# Allegro board ETDS_CHIP_AN.brd
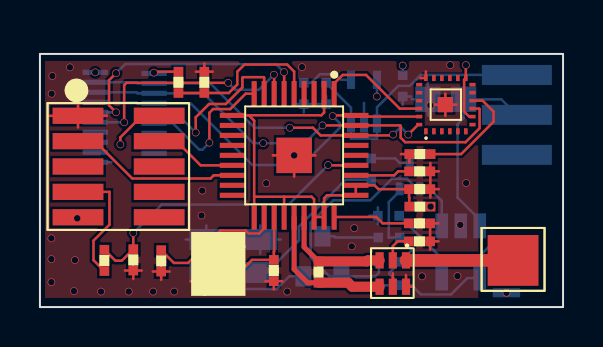
[diagram p0: board, top side]
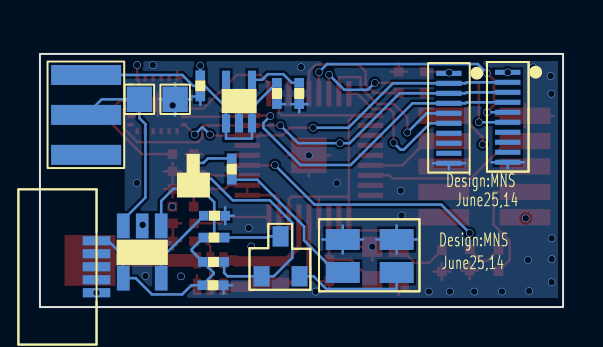
[diagram p1: board, bottom side, seen from below]

Outline 26.19 x 12.67 mm; copper layers: TOP, GND, VCC3V, BOTTOM. Coordinates in mm from the lower left corner of the outline.
Outline path: rectangle 0,0 26.19,12.67

## Placement (name value [footprint] x y rotation side)
C2  10nF  [C0402]  13.89 11.66 270 bottom
C3  1uF  [C0402]  18.85 12.04 270 bottom
C4  22pF  [C0402]  11.02 2.79 270 top
C5  22pF  [C0402]  5.38 3.28 270 top
C7  1uF  [C0402]  18.05 6.11 0 top
C8  1uF  [C0402]  18.05 5.22 0 top
C11  22pF  [C0402]  18.03 2.6 0 top
C32  1uF  [C0402]  18.49 0.41 180 bottom
C39  1uF  [C0402]  15.01 11.66 270 bottom
C40  1nF  [C0402]  3.99 3.33 270 top
C42  0.1uF  [C0402]  19.99 8.34 180 top
H5  Header1X1  [H1]  21.95 9.66 180 bottom
H6  Header5X1  [MICROUSB]  22.59 5.92 0 bottom
H8  Header1X1  [H1]  20.15 9.66 180 bottom
H10  Header5X2  [H10]  3.94 6.65 180 bottom
H11  Header5X2  [H10]  6.88 6.6 180 bottom
H12  antenna  [ANTENNA]  22.06 0.79 0 top
J2  CON5  [H5X2]  0.38 3.86 0 top
L1  10nH  [L0402]  14.27 0.89 90 top
L2  BEAD  [L0402]  19.89 5.36 180 top
LED1  APBL3025  [LEDAP]  12.22 0.79 180 bottom
Q1  DMP22D6UT  [MOS_DMP]  19.33 5.49 180 bottom
Q2  DMN5L06K  [MOS_DMN]  15.7 0.86 180 bottom
R4  56k  [R0402]  18.14 3.86 0 top
R28  10k  [R0402]  18.36 1.93 180 bottom
R29  8k  [R0402]  16.61 3.81 0 bottom
R40  3.9k  [R0402]  16.26 6.05 90 bottom
R41  100k  [R0402]  7.26 10.39 90 top
R42  200k  [R0402]  7.9 12.12 270 top
R43  1k  [R0402]  18.31 4.24 180 bottom
R44  2.7k  [R0402]  3.56 1.47 90 top
S1  CSS-1210B  [SWITCH]  25.81 6.96 180 bottom
U1  -  [TPS71730]  17.22 8.61 180 bottom
U2  -  [LTC4054]  19.66 4.8 0 bottom
U6  balunn  [BALUNN]  16.57 0.46 0 top
U7  1  [CC2510]  12.73 7.59 270 top
U8  -  [MPU9250]  20.32 10.13 90 top
Y1  26MHz  [CRYST_26M]  10.44 0.51 90 top

## Library data of the parts
C2 C3 C11 C39 = C: room: 1
C4 C5 C7 C8 C32 C40 C42 = C
H5 H12 = Header1X1_2: room: 1
H6 = Header1X1_0
H8 = Header1X1_1: room: 1
H10 H11 = Header7X1_0
J2 = CON5_0
L1 L2 = INDUCTOR
LED1 = BRPG1204_0
Q1 = MOSFET P_0
Q2 = DMN5L06K
R4 R28 R29 R40-R44 = R
S1 = SW_0: room: 1
U1 = TPS71730_0: room: 1
U2 = LTC4054_0
U6 = balunn
U7 = cc2510f32rspr_1
U8 = MPU9250_1
Y1 = CRYSTAL_2

## Footprints (pads in the part's own frame, mm; a bottom-side part is the same pattern mirrored in y, then rotated)
ANTENNA
  rect 2.54x2.54 smd: 1(1.626,1.549)
BALUNN
  rect 0.406x0.813 smd: 1(1.753,1.88) 2(1.092,1.88) 3(0.432,1.88) 4(0.432,0.559) 5(1.092,0.559) 6(1.753,0.559)
C0402
  rect 0.483x0.483 smd: 1(0.432,0.686) 2(1.499,0.686)
CC2510
  rect 1.27x0.254 smd: 1(-3.086,2) 2(-3.086,1.5) 3(-3.086,1) 4(-3.086,0.5) 5(-3.086,0) 6(-3.086,-0.5) 7(-3.086,-1) 8(-3.086,-1.5) 9(-3.086,-2) 19(3.086,-2) 20(3.086,-1.5) 21(3.086,-1) 22(3.086,-0.5) 23(3.086,0) 24(3.086,0.5) 25(3.086,1) 26(3.086,1.5) 27(3.086,2)
  rect 0.254x1.27 smd: 10(-2,-3.086) 11(-1.5,-3.086) 12(-1,-3.086) 13(-0.5,-3.086) 14(0,-3.086) 15(0.5,-3.086) 16(1,-3.086) 17(1.5,-3.086) 18(2,-3.086) 28(2,3.086) 29(1.5,3.086) 30(1,3.086) 31(0.5,3.086) 32(0,3.086) 33(-0.5,3.086) 34(-1,3.086) 35(-1.5,3.086) 36(-2,3.086)
  rect 1.778x1.778 smd: 37(0,0)
CRYST_26M
  rect 1.016x1.016 smd: 1(0.787,0.889) 2(2.515,2.21) 3(2.515,0.889) 4(0.787,2.21)
H1
  rect 1.27x1.27 smd: 1(0.737,0.737)
H5X2
  rect 2.54x0.813 smd: 1(1.524,5.715) 2(5.588,5.715) 3(1.524,4.445) 4(5.588,4.445) 5(1.524,3.175) 6(5.588,3.175) 7(1.524,1.905) 8(5.588,1.905) 9(1.524,0.635) 10(5.588,0.635)
H10
  rect 1.27x0.254 smd: 1(1.168,5.097) 2(1.168,4.597) 3(1.168,4.097) 4(1.168,3.596) 5(1.168,3.096) 6(1.168,2.596) 7(1.168,2.096) 8(1.168,1.596) 9(1.168,1.096) 10(1.168,0.596)
L0402
  rect 0.483x0.483 smd: 1(0.33,0.33) 2(1.397,0.33)
LEDAP
  rect 1.7x1.05 smd: 1(1.187,0.945) 2(1.187,2.595) 3(3.887,0.945) 4(3.887,2.595)
LTC4054
  rect 0.635x1.245 smd: 1(0.457,0.737) 2(1.407,0.737) 3(2.357,0.737) 4(2.357,3.353) 5(0.457,3.353)
MICROUSB
  rect 1.372x0.457 smd: 1(0.762,2.601) 2(0.762,3.251) 3(0.762,3.901) 4(0.762,4.552) 5(0.762,5.202)
MOS_DMN
  rect 0.8x1.016 smd: 1(0.605,0.676) 2(2.504,0.676) 3(1.554,2.676)
MOS_DMP
  rect 0.4x0.635 smd: 1(0.32,0.43) 2(1.32,0.43) 3(0.82,1.73)
MPU9250
  rect 0.305x0.178 smd: 1(-1.333,1) 2(-1.333,0.6) 3(-1.333,0.2) 4(-1.333,-0.2) 5(-1.333,-0.6) 6(-1.333,-1) 13(1.333,-1) 14(1.333,-0.6) 15(1.333,-0.2) 16(1.333,0.2) 17(1.333,0.6) 18(1.333,1)
  rect 0.178x0.305 smd: 7(-1,-1.333) 8(-0.6,-1.333) 9(-0.2,-1.333) 10(0.2,-1.333) 11(0.6,-1.333) 12(1,-1.333) 19(1,1.333) 20(0.6,1.333) 21(0.2,1.333) 22(-0.2,1.333) 23(-0.6,1.333) 24(-1,1.333)
  rect 0.762x0.762 smd: 25(0,0.025)
R0402
  rect 0.483x0.483 smd: 1(0.33,0.33) 2(1.397,0.33)
SWITCH
  rect 3.505x1 smd: 1(1.93,4.661) 2(1.93,2.661) 3(1.93,0.661)
TPS71730
  rect 0.406x0.914 smd: 1(0.349,0.584) 2(0.999,0.584) 3(1.649,0.584) 4(1.649,2.769) 5(0.349,2.769)

## Nets
GND: C2.2 C3.2 C4.2 C5.2 C7.2 C8.2 C11.2 C32.2 C39.2 C40.2 C42.2 H6.5(GND) H8.1 H10.10 H11.10 J2.1 LED1.2(-1) LED1.4(-2) R4.2 R42.1 R43.2 U1.2(GND) U2.2(GND) U6.5(GND2) U6.6(GND3) U7.37(GND EXPOSED) U8.18(GND) U8.25 Y1.3(GND#3) Y1.4(GND#4)
VBAT: C39.1 S1.1(R) U1.1(IN) U1.3(EN)
VCC1: C8.1 L2.2 U7.2(DVDD#2) U7.10(DVDD#10) U7.19(AVDD#19) U7.22(AVDD#22) U7.25(AVDD#25) U7.26(AVDD#26) U7.28(GUARD) U7.29(AVDD_DREG)
VCC3V: C3.1 H10.1 H11.1 J2.2 J2.9 L2.1 R41.2 U1.5(OUT) U8.8(VDDIO) U8.13(VDD)
BAT: H5.1 S1.2(COM) U2.3(BAT)
RESET_N: C40.1 R44.2 U7.31(RESET_N)
SPI_MISO: H10.3 H11.3 U7.35(P1_4) U8.9(AD0/SDO)
SPI_MOSI: H10.2 H11.2 U7.34(P1_5) U8.24(SDA/SDI)
SPI_NCS_S1: H10.5 U7.6(P0_1)
SPI_NCS_S2: H10.6 U7.7(P0_2)
SPI_NCS_S3: H11.5 U7.8(P0_3)
SPI_NCS_S4: H11.6 U7.9(P0_4)
SPI_NCS_S5: U7.1(P1_2) U8.22(NCS)
SPI_SCK: H10.4 H11.4 U7.36(P1_3) U8.23(SCL/SCLK)
V_5V: C32.1 H6.1(5V) Q1.2(DRAIN) R28.1 R29.2 U2.4(VCC)
N11196741: L1.2 U6.3(BP1) U7.24(RF_N)
N11196757: R41.1 R42.2 U7.5(P0_0)
N11196929: C7.1 U7.30(DCOUPL)
N11196989: R4.1 U7.27(RBIAS)
N11197045: C4.1 U7.21(XOSC_Q1) Y1.1
N11197053: C5.1 U7.20(XOSC_Q2) Y1.2
N11197261: L1.1 U6.4(BP2) U7.23(RF_P)
N11197353: J2.7 R44.1
N11197365: J2.3 U7.16(P2_2)
N11197369: J2.4 U7.15(P2_1)
N11197613: C42.1 U8.10(REGOUT)
N11197839: C2.1 U1.4(NR/FB)
N11198119: Q2.3(D) R29.1
N11198133: Q1.1(GATE) Q2.1(G) R28.2 U2.1(\\C\H\R\G)
N11198177: LED1.3(GREEN) Q2.2(S)
N11198181: LED1.1(RED) R40.1
N11198193: Q1.3(SOURCE) R40.2
N11198307: R43.1 U2.5(PROG)
N11198497: H12.1 U6.1(UBP)
N111984691: C11.1 U6.2(GND1)

Pads without a net: H6 2 3 4; H10 7 8 9; H11 7 8 9; J2 5 6 8 10; S1 3; U7 3 4 11 12 13 14 17 18 32 33; U8 1 2 3 4 5 6 7 11 12 14 15 16 17 19 20 21

## Via types
v1: diameter 0.381, hole 0.33, TOP to BOTTOM, 52 vias

## Routing (per net, layer and track width the routed paths; a pad name or vN(x,y) marks a point on that pad's centre or on a via; arc(x,y) is an arc through that point)
GND: length 52
  TOP w0.127: 18.71,1.02 U6.6 18.33,1.6 ; C40.2 4.67,2.25 ; C40.2 5.09,1.83 ; C40.2 4.25,1.83 ; C40.2 4.67,1.41 ; v1(12.73,7.59) 13.79,7.59 ; v1(12.73,7.59) 12.73,6.53 ; v1(12.73,7.59) 11.66,7.59 ; 20.29,9.58 U8.25 ; U8.25 20.29,10.69 ; U8.25 19.74,10.13 ; U8.25 20.85,10.13 ; 5.65,1.78 C5.2 ; C5.2 6.49,1.78 ; C5.2 6.07,1.36 ; C5.2 6.07,2.2 ; 7.81,11.79 R42.1 ; R42.1 8.23,12.21 ; R42.1 8.65,11.79 ; C11.2 19.53,3.71 ; C11.2 19.95,3.29 ; C11.2 19.53,2.87 ; C11.2 19.11,3.29 ; C8.2 19.96,5.91 ; C8.2 19.55,6.33 ; C8.2 19.55,5.49 ; C8.2 19.13,5.91 ; J2.1 1.91,10.16 ; J2.1 3.35,9.58 ; J2.1 1.91,8.99 ; J2.1 0.46,9.58 ; Y1.4 8.23,1.98 ; Y1.4 7.54,1.3 ; Y1.4 8.23,0.61 ; 19.05,11.47 U8.18 19.32,11.8 ; 18.07,7.66 C42.2 ; C42.2 18.91,7.66 ; C42.2 18.49,7.24 ; 9.55,2.34 v1(9.55,3.02) 10.24,3.02 ; 11.71,0.88 C4.2 ; C4.2 11.71,1.72 ; C4.2 11.29,1.3 ; C4.2 12.13,1.3 ; C7.2 19.55,7.21 ; C7.2 19.55,6.37 ; C7.2 19.96,6.79 ; C7.2 19.13,6.79 ; 19.53,3.77 R4.2 ; R4.2 19.95,4.19 ; R4.2 19.11,4.19 ; 17.67,1.69 U6.5
  GND w0.127: v1(23.36,0.72) 21.7,0.72 21.7,0.72
  BOTTOM w0.127: 11.03,2.68 LED1.2 ; LED1.2 12.06,3.38 ; LED1.2 10,3.38 ; LED1.2 11.03,4.09 ; 21.07,4.09 U2.2 21.07,3.76 ; 18.6,10.4 H8.1 ; H8.1 19.42,11.21 ; H8.1 19.42,9.59 ; H8.1 20.23,10.4 ; 16.99,0.67 C32.2 ; C32.2 17.41,1.09 ; C32.2 16.57,1.09 ; 16.92,4.15 R43.2 ; R43.2 16.5,4.57 ; R43.2 16.92,4.99 ; C2.2 13.21,10.58 ; C2.2 12.79,10.16 ; C2.2 13.63,10.16 ; C2.2 13.21,9.74 ; 18.16,10.12 C3.2 18.58,10.54 ; 1.96,7.25 H10.10 ; H10.10 3.58,7.25 ; H10.10 2.77,6.95 ; 16.22,10.22 U1.2 ; 8.33,2.68 LED1.4 ; LED1.4 8.33,4.09 ; LED1.4 9.36,3.38 ; LED1.4 7.3,3.38 ; 14.33,10.58 C39.2 13.91,10.16 ; 4.9,7.2 H11.10 ; H11.10 6.53,7.2 ; H11.10 5.72,6.89
  vias: v1(0.57,3.44) v1(0.57,2.4) v1(0.57,1.24) v1(0.62,11.57) v1(0.58,10.68) v1(1.5,12) v1(1.75,2.35) v1(1.7,0.8) v1(3.06,0.77) v1(4.44,0.77) v1(5.66,0.77) v1(6.72,0.77) v1(8.13,5.83) v1(8.09,4.58) v1(11.33,6.2) v1(12.38,0.77) v1(13.12,12.01) v1(15.61,3.04) v1(15.74,3.95) v1(19.13,1.54) v1(19.55,10.1) v1(20.54,12.12) v1(20.9,1.55) v1(21.04,4.11) v1(21.34,6.21)
VBAT: length 13.9
  BOTTOM w0.127: C39.1 15.57,9.98 U1.3 15.57,8.43 16.87,8.43 U1.1 16.87,10 17.94,11.07 18.52,11.07 19.06,11.62 S1.1
VCC1: length 23
  TOP w0.127: 10.73,5.52 10.73,9.33 10.46,9.59 ; 10.73,5.52 12.22,5.52 ; 10.73,5.52 U7.19 ; 12.22,5.52 12.22,5.08 12.23,5.08 U7.22 ; 12.22,5.52 13.6,5.52 13.73,5.4 U7.25 U7.26 14.23,5.45 14.37,5.59 U7.28 U7.29 16.75,6.09 16.94,5.91 C8.1 18.48,5.49 18.49,5.47 L2.2 ; 10.46,9.59 U7.10 ; 10.46,9.59 10.46,9.6 14.09,9.6 14.23,9.74 U7.2
VCC3V: length 8.3
  TOP w0.127: R41.2 5.75,11.79 v1(5.7,11.74) ; U8.8 21.49,9.53 21.23,9.79 21.23,11.38 U8.13 21.32,12.11 v1(21.32,12.12) ; v1(4.03,8.14) 4.03,8.5 5.11,9.58 J2.2
  BOTTOM w0.127: H11.1 5.7,11.71 v1(5.7,11.74) ; v1(16.87,10.54) 16.87,10.55 U1.5 ; C3.1 v1(18.16,12.09)
  vias: v1(1.87,4.44) v1(2.77,11.75) v1(19.56,5.03)
BAT: length 9.9
  BOTTOM w0.127: S1.2 23.1,10.4 H5.1 21.21,9.46 20.91,9.16 20.91,5.48 22.02,4.37 U2.3
RESET_N: length 15.3
  TOP w0.127: U7.31 14.44,7.09 v1(14.43,7.11) ; v1(4.67,3.71) C40.1 4.1,2.32 3.77,2.32 R44.2
  BOTTOM w0.127: v1(14.43,7.11) 12.45,5.13 6.1,5.13 v1(4.67,3.71)
SPI_MISO: length 23
  TOP w0.127: v1(14.15,9.09) U7.35 18.03,9.09 18.06,9.07 18.06,8.48 18.28,8.25 21.31,8.25 22.01,8.95 22.01,9.91 21.98,9.93 U8.9
  BOTTOM w0.127: v1(14.15,9.09) 13.26,8.2 v1(11.18,8.2) 10.68,8.2 8.18,10.7 H11.3 4.89,10.7 4.84,10.75 H10.3
SPI_MOSI: length 17.8
  TOP w0.127: v1(17.68,8.64) 17.64,8.59 U7.34 14.05,8.59 13.67,8.98 v1(12.51,8.98) ; v1(18.44,8.64) 18.94,9.13 U8.24
  BOTTOM w0.127: v1(17.68,8.64) 18.03,8.99 18.09,8.99 v1(18.44,8.64) ; H10.2 4.84,11.25 4.89,11.2 H11.2 8.52,11.2 10.74,8.98 v1(12.51,8.98)
SPI_NCS_S1: length 13.1
  TOP w0.127: U7.6 12.23,11.75 v1(12.22,11.76) ; v1(3.81,11.71) 3.46,11.36 3.46,10.1 v1(3.81,9.75)
  BOTTOM w0.127: v1(12.22,11.76) 11.81,12.17 4.27,12.17 v1(3.81,11.71) ; H10.5 v1(3.81,9.75)
SPI_NCS_S2: length 12.3
  TOP w0.127: v1(4.22,9.25) 4.22,11.11 4.33,11.23 v1(9.42,11.23) ; U7.7 11.73,11.62 v1(11.71,11.63)
  BOTTOM w0.127: v1(9.42,11.23) 9.77,10.88 10.95,10.88 v1(11.71,11.63) ; H10.6 v1(4.22,9.25)
SPI_NCS_S3: length 8.6
  TOP w0.127: v1(7.8,8.74) 7.8,9.5 8.46,10.17 9.3,10.17 10.13,11 10.13,11.48 10.16,11.51 11.2,11.51 11.23,11.48 U7.8
  BOTTOM w0.127: v1(7.8,8.74) 6.84,9.7 H11.5
SPI_NCS_S4: length 7.6
  TOP w0.127: U7.9 10.29,10.68 9.53,9.91 8.67,9.91 8.48,9.73 v1(8.48,8.23)
  BOTTOM w0.127: H11.6 6.65,9.2 7.98,7.88 8.13,7.88 v1(8.48,8.23)
SPI_NCS_S5: length 5.6
  TOP w0.127: U7.1 14.73,11.19 15.16,11.62 16.32,11.62 18.01,9.93 U8.22
SPI_SCK: length 19.4
  TOP w0.127: v1(14.66,9.56) 14.69,9.59 U7.36 15.87,9.53 U8.23
  BOTTOM w0.127: H10.4 4.84,10.25 4.89,10.2 H11.4 7.54,10.2 10.63,7.11 13.14,7.11 15.01,8.97 15.01,9.21 v1(14.66,9.56)
V_5V: length 13.8
  BOTTOM w0.127: H6.1 22.77,3.32 22.02,2.57 U2.4 21.39,1.45 20.58,0.63 19.06,0.63 18.61,1.09 C32.1 17.49,1.66 17.49,1.71 R28.1 18.58,2.81 18.58,2.91 R29.2 17.46,3.48 17.46,5.25 18.01,5.8 Q1.2
N11196741: length 5.6
  TOP w0.254: U7.24 13.23,3.01 L1.2
  TOP w0.508: L1.2 16.37,2.29 16.42,2.34 U6.3
N11196757: length 8
  TOP w0.127: R41.1 R42.2 9.45,10.72 9.88,11.15 9.88,11.79 10.24,12.14 12.38,12.14 12.73,11.79 U7.5
N11196929: length 2.7
  TOP w0.127: U7.30 17.73,6.59 17.93,6.79 C7.1
N11196989: length 3.9
  TOP w0.127: U7.27 16.84,4.51 17.16,4.19 R4.1
N11197045: length 4.8
  TOP w0.127: Y1.1 10.62,2.36 C4.1 11.71,2.78 11.73,2.79 U7.21
N11197053: length 6.8
  TOP w0.127: U7.20 11.23,3.94 10.97,3.68 10.45,3.68 10.29,3.84 9.04,3.84 Y1.2 7.42,2.21 6.71,2.21 C5.1
N11197261: length 7.3
  TOP w0.254: U7.23 12.73,1.89 13.4,1.22 L1.1
  TOP w0.508: L1.1 15.43,1.22 15.63,1.02 U6.4
N11197353: length 6.1
  TOP w0.127: R44.1 2.68,2.35 2.68,3.32 3.48,4.12 3.48,5.77 J2.7
N11197365: length 8.6
  TOP w0.127: U7.16 8.7,6.59 8.54,6.44 4.62,6.44 2.75,8.31 J2.3
N11197369: length 4.2
  TOP w0.127: U7.15 8.04,7.09 6.83,8.31 J2.4
N11197613: length 5.6
  TOP w0.127: C42.1 21.09,7.66 22.71,9.28 22.71,9.79 22.16,10.33 U8.10
N11197839: length 2.7
  BOTTOM w0.127: U1.4 15.06,11.38 14.79,11.66 14.01,11.66 13.57,11.23 C2.1
N11198119: length 2.8
  BOTTOM w0.127: R29.1 14.79,3.48 14.73,3.54 Q2.3
N11198133: length 15.4
  BOTTOM w0.127: R28.2 16.97,1.71 16.79,1.54 Q2.1 14.48,1.54 13.55,2.47 13.55,4.21 14.69,5.35 16.54,5.35 17.62,6.42 18.37,6.42 18.88,5.92 Q1.1 19.51,5.92 20.12,5.31 U2.1
N11198177: length 6
  BOTTOM w0.127: LED1.3 8.33,0.9 11.85,0.9 12.49,1.54 Q2.2
N11198181: length 7.9
  BOTTOM w0.127: R40.1 15.31,6.38 12.97,4.03 12.97,3.34 11.35,1.73 LED1.1
N11198193: length 2
  BOTTOM w0.127: Q1.3 18,7.22 17.78,7.44 R40.2
N11198307: length 4
  BOTTOM w0.127: R43.1 20.12,2.44 U2.5
N11198497: length 5.4
  TOP w0.635: U6.1 H12.1
N111984691: length 1.6
  TOP w0.127: C11.1 17.91,3.29 17.67,3.05 U6.2

## Copper pours and planes (outline as drawn; the poured copper is in the pictures)
GND on TOP: 0.25,0.46 0.25,12.32 21.95,12.32 21.95,0.46 ; 5 cut-outs
GND on BOTTOM: 0.25,0.46 0.25,12.32 21.95,12.32 21.95,0.46 ; 7 cut-outs
GND on GND: 0.25,0.46 0.25,12.32 21.95,12.32 21.95,0.46
VCC3V on VCC3V: 0.25,0.46 0.25,12.32 21.79,12.32 21.79,0.46

## Text on the board
Ref Des/Silkscreen Bottom: June25,14 | Design:MNS
